# Altium PCB BugBusterMain.PcbDoc (part 4 of 6)
Units mm, origin at the board's own origin, x right, y up, seen from the top; angles counter-clockwise.
Board outline 110 x 80 mm, 6 copper layers (Top Layer, Inner Layer 1, Inner Layer 2, Inner Layer 3, Inner Layer 4, Bottom Layer), stack 1.546 mm thick; 244 components, 246 nets, 1173 pads, 1169 vias.
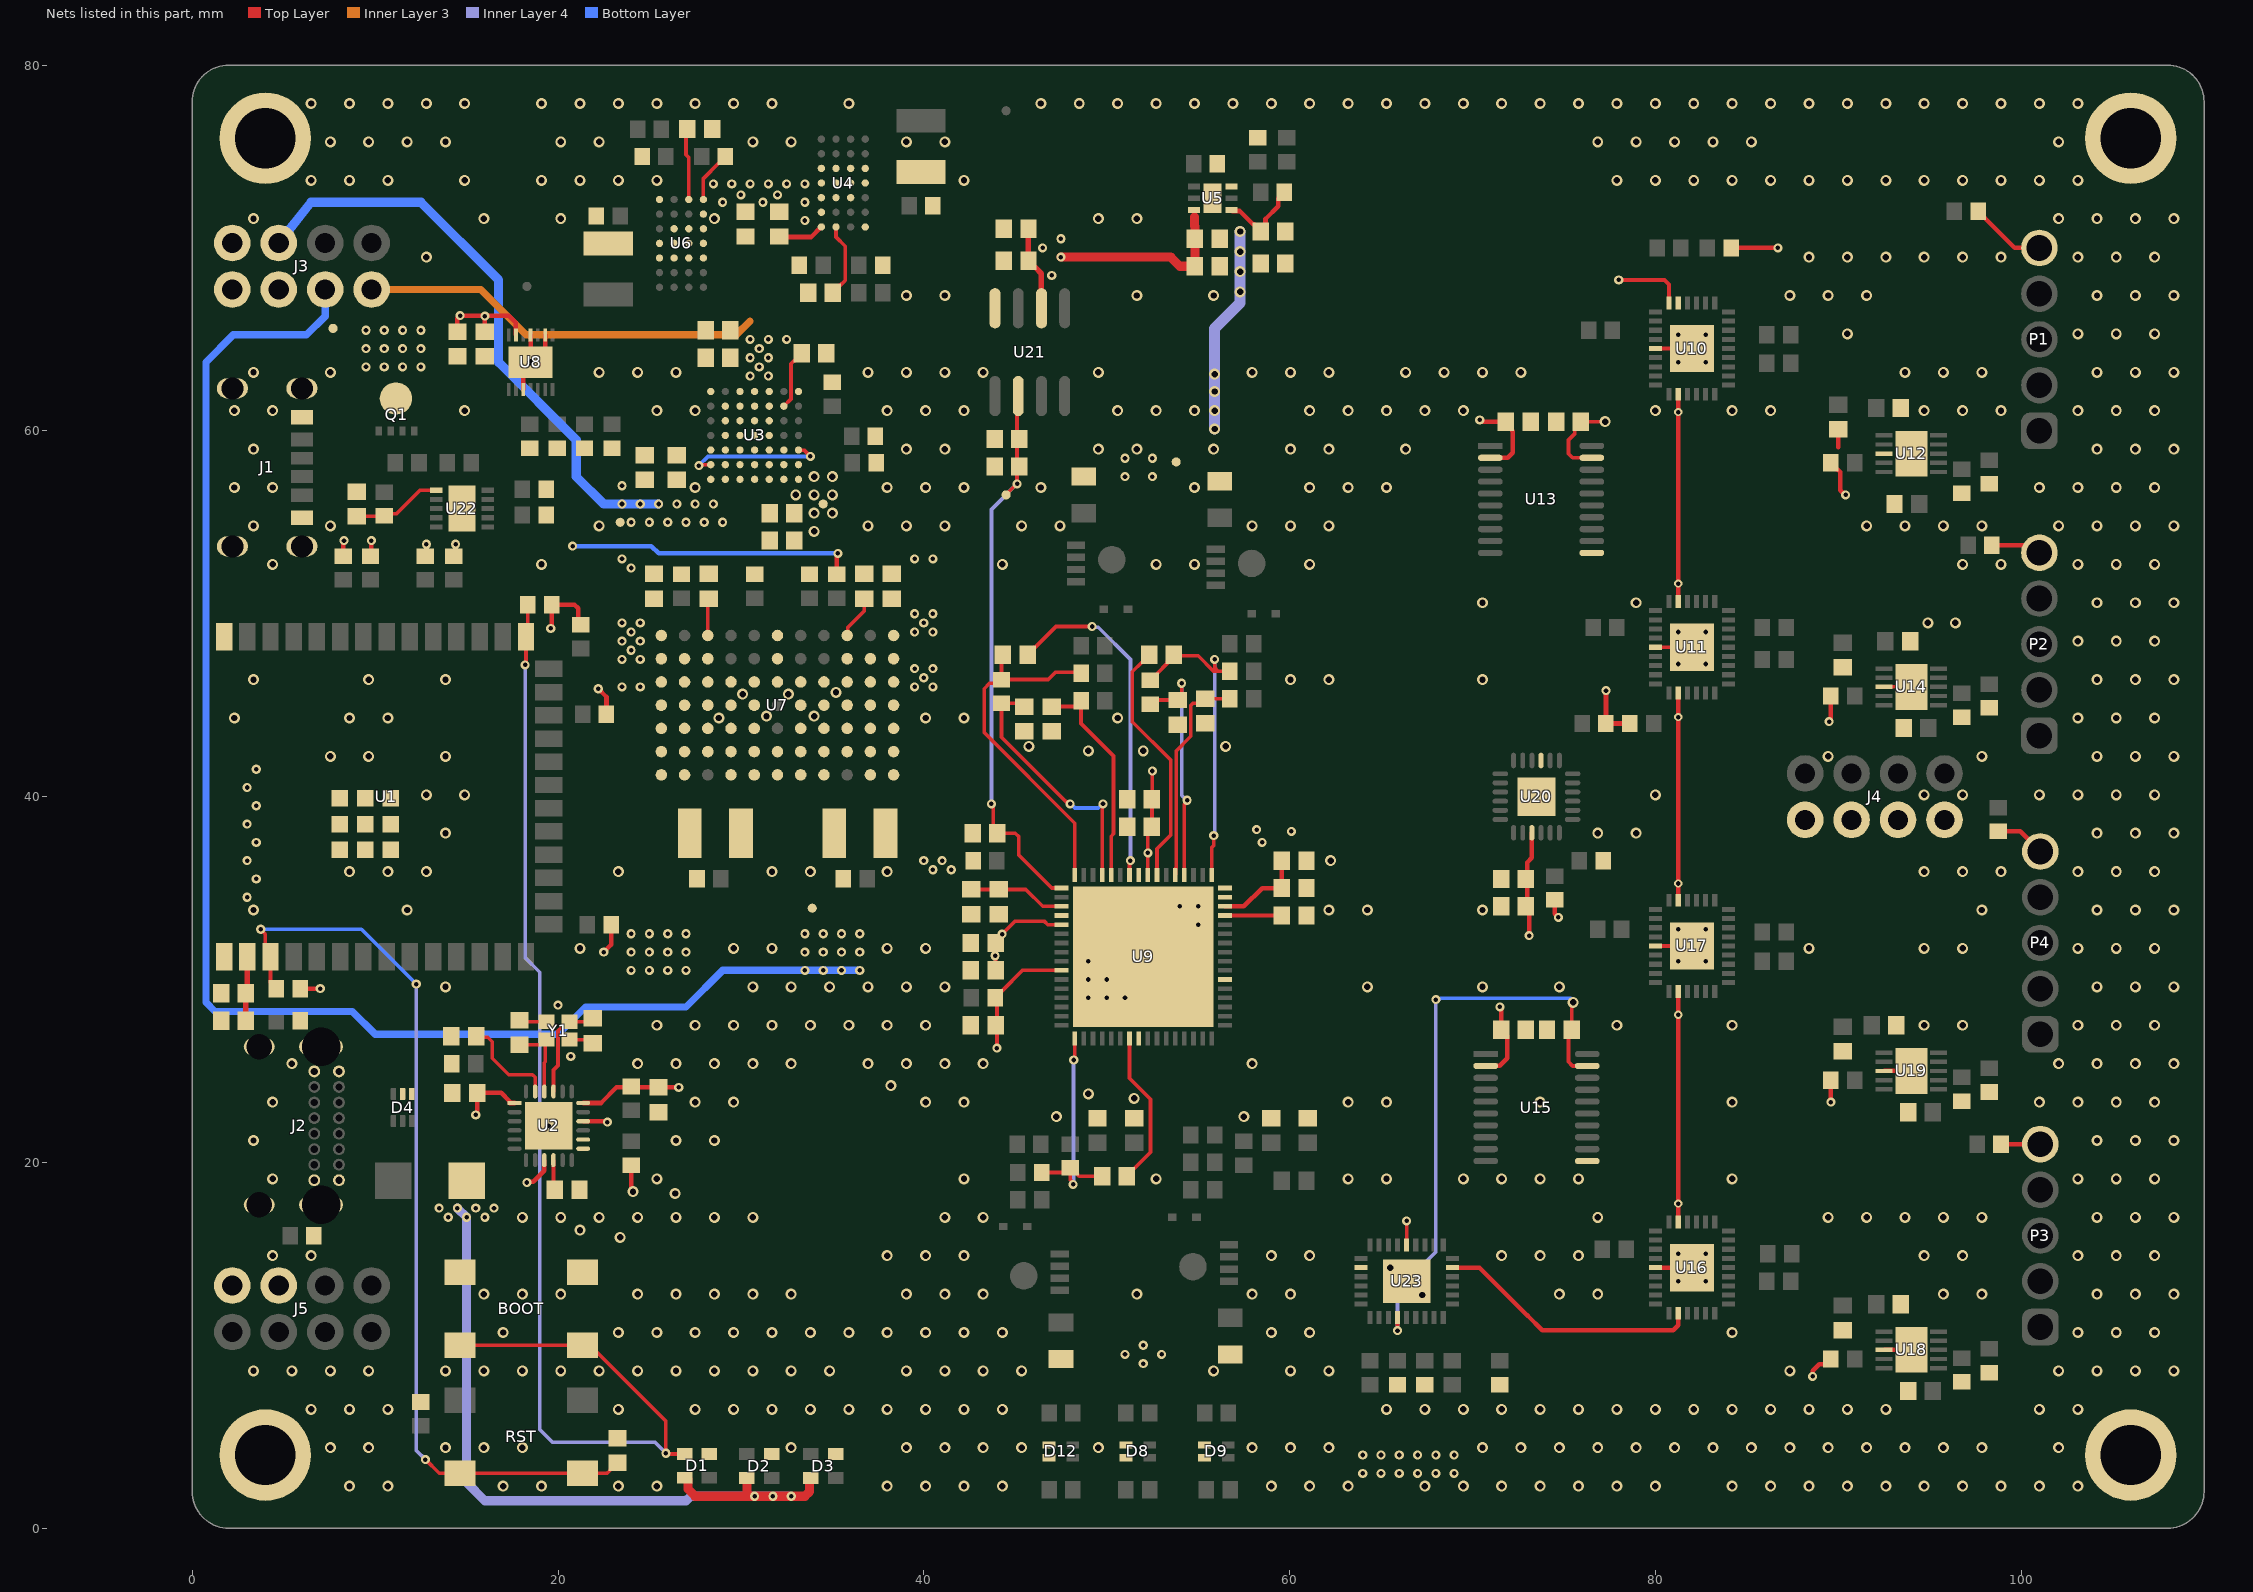
[diagram p6: the nets of this part, all layers, seen from the top]

## Via types
v1: diameter 0.6, hole 0.35, Top Layer to Bottom Layer, tented both sides, 608 vias
v2: diameter 0.5, hole 0.25, Top Layer to Bottom Layer, tented both sides, 555 vias
v3: diameter 0.45, hole 0.25, Top Layer to Bottom Layer, tented both sides, 6 vias

## Nets (pads, with @x,y where several pads share a name; then routed paths per layer and width w, separated by ;. In a path a pad name is that pad's centre, name@x,y a point inside that pad or via, vN(x,y) a via of type N, cw(c..) or ccw(c..) an arc to the next point about the centre after c; other vN are vias at no path point) (continued)
3V3_BUCK: (continued)
  Top Layer w0.25: R3.2@5.9,29.5 v2(7,29.5) ; R1.2@8.25,53.15 8.25,53.85 8.3,53.9 v2(8.3,54) ; R2.2@9.75,53.15 9.78,53.18 9.78,53.98 v2(9.8,54) ; R64.1@12.75,53.15 12.8,53.2 v2(12.8,53.8) ; R63.1@14.3,53.15 14.4,53.25 v2(14.4,53.8) ; C30.2@14.5,65.425 14.5,66.154 v2(14.646,66.3) v2@15.973,66.3 ; v2(15.5,22.6) 15.5,22.668 15.575,22.743 C6.2@15.575,23.8 16.9,23.8 17.369,23.331 17.369,23.255 17.374,23.25 U2.1@17.624,23.25 ; C31.2@16,65.425 v2(16,66.273) v2@15.973,66.3 ; U8.13@17.7,65.249 17.7,65.9 17.3,66.3 v2@15.973,66.3 ; v2(18.3,18.9) 18.342,18.942 18.642,18.942 19.25,19.55 U2.9@19.25,20.124 ; v2(19.6,49.2) 19.6,49.268 19.65,49.318 R5.1@19.65,50.5 20.9,50.5 21.1,50.3 21.1,49.55 R56.1@21.25,49.4 ; U2.16@21.376,22.25 22.582,22.25 22.632,22.2 v2(22.7,22.2) ; U2.18@21.376,23.25 22.35,23.25 23.2,24.1 C5.2@25.5,24.1 v2(26.6,24.1) ; v2(22.2,45.9) 22.65,45.45 R7.1@22.65,44.5 ; v2(22.5,31.5) 22.9,31.9 R6.1@22.9,33 ; R15.1@24,19.85 24,18.595 24.1,18.495 v1(24.1,18.4) ; R96.2@35.25,52.15 35.25,53.182 35.3,53.232 v2(35.3,53.3) ; U9.62@56.47,34 57.5,34 58.5,35 C39.1@59.575,35 C36.1@59.575,36.5 ; v2(70.4,60.6) 70.468,60.6 70.568,60.5 C66.2@71.825,60.5 72.15,60.175 72.15,60.029 72.2,59.979 72.2,58.8 71.925,58.525 U13.2@70.975,58.525 ; U15.2@70.725,25.275 70.739,25.289 71.489,25.289 71.9,25.7 71.9,26.925 C61.2@71.575,27.25 71.575,28.357 71.5,28.432 v2(71.5,28.5) ; v2(73.1,32.4) 73.1,33.825 C76.2@72.925,34 73,34.075 73,36.4 73.25,36.65 U20.21@73.25,38.025 ; R94.1@74.5,34.35 74.5,33.6 v2(74.7,33.4) ; v2(77.3,45.8) R112.2@77.3,44 R111.2@78.6,44 ; R78.1@84.15,70 v2(86.7,70) ; v2(88.6,8.3) 88.6,8.6 88.96,8.96 89.31,8.96 R88.1@89.6,9.25 ; v2(89.5,44.1) 89.5,44.168 89.6,44.268 R79.1@89.6,45.5 ; v2(89.6,23.3) R91.1@89.6,24.5 ; R70.1@89.6,58.25 89.6,58.2 89.9,57.9 89.95,57.9 90.1,57.75 90.1,56.746 90.346,56.5 v2(90.4,56.5)
  Top Layer w0.3: C3.2@2.925,27.75 C2.2@2.925,29.25 3.01,29.335 U1.2@3.01,31.25
  Bottom Layer w0.25: v2(20.8,53.7) 25.1,53.7 25.5,53.3 v2(35.3,53.3)
  other v1: 23.4,15.9 21.2,16.3 26.4,18.3 38.2,24.2 34,54.5 34,55.5 35,55.5 33,56.5 34,56.5 35,56.5 34,57.5 35,57.5
  other v2: 64,3 65,3 66,3 67,3 68,3 69,3 64,4 65,4 66,4 67,4 68,4 69,4 3,34.5 3.5,35.5 3,36.5 3.5,37.5 58.5,37.5 60.1,38.1 58.2,38.2 3,38.5 3.5,39.5 3,40.5 3.5,41.5
5V_BUCK: C11.2 C12.2 C21.2 C22.2 C28.2 C29.2 C37.1 C40.1 C77.2 C78.2 D1.4 D2.4 D3.4 D5.1 J3.3 pad.11 U3.E7 U3.F1 U3.F2 U3.G1 U3.G2 U5.6 U7.A5 U7.A6 U7.A7 U7.L5 U7.L6 U7.L7 U9.19 U21.2 | length 103.8
  Top Layer w0.2: v2(27.7,58.1) 27.75,58.15 U3.F1@28.35,58.15 ; U3.E7@33.15,58.95 33.154,58.946 33.454,58.946 v2(33.8,58.6) ; C40.1@42.6,34.925 C37.1@44.1,34.925 45.575,34.925 46.5,34 U9.19@47.53,34 ; U5.6@54.765,72.068 54.775,72.058 54.775,71.725 54.8,71.7
  Top Layer w0.3: C78.2@45.725,69.25 46.025,68.95 46.075,68.95 46.435,68.59 U21.2@46.435,66.7 ; C78.2@45.725,69.3 C77.2@45.725,71.05
  Top Layer w0.5: D1.4@26.929,2.758 27.029,2.758 27.104,2.683 27.104,2.146 27.5,1.75 v2@30.5,1.75 ; D2.4@30.325,2.75 30.325,1.925 v2@30.5,1.75 ; D3.4@33.825,2.75 33.757,2.682 33.757,2.007 33.5,1.75 v2(32.75,1.75) v2(31.75,1.75) v2(30.75,1.75) v2@30.5,1.75 ; v2(47.5,69.5) 53.5,69.5 54,69 C21.2@54.825,69 54.825,71.175 54.8,71.2 54.8,71.7
  Inner Layer 4 w0.5: v2(14.5,17.5) v2(15,17) 15,2.5 16,1.5 27,1.5 27.25,1.75 v2(30.75,1.75) v2(31.75,1.75) v2(32.75,1.75)
  Bottom Layer w0.2: v2(27.7,58.1) 28.2,58.6 v2(33.8,58.6)
  Bottom Layer w0.5: J3.3@4.73,70.27 6.5,72.5 12.5,72.5 16.75,68.25 16.75,63.75 21,59.5 21,57.5 22.5,56 v2(25.5,56)
  other v2: 14,17 16,17 13.5,17.5 15.5,17.5 16.5,17.5 40.5,36 41.5,36 40,36.5 41,36.5 23.5,46 24.5,46 39.5,46 40.5,46 40,46.5 39.5,47 40.5,47 23.5,47.5 24.5,47.5 24,48 23.5,48.5 24.5,48.5 24,49 39.5,49 40.5,49 23.5,49.5 24.5,49.5 40,49.5 39.5,50 40.5,50 24,52.5 23.5,53 39.5,53 40.5,53 24,55 25,55 26,55 27,55 28,55 29,55 23.5,56 24.5,56 26.5,56 27.5,56 28.5,56 23.5,57 47,68.5 46.5,70 47.5,70.5
20V_USB: C13.2 C14.2 C15.2 C25.2 J3.6 pad.8 Q1.5-6-7-8 U3.A3 U3.A4 U3.A5 U4.B4 U4.C4 U6.B4 U6.C4
  other v2: 30.5,63 31.5,63 9.5,63.5 10.5,63.5 11.5,63.5 12.5,63.5 31,63.5 30.5,64 31.5,64 9.5,64.5 10.5,64.5 11.5,64.5 12.5,64.5 31,64.5 30.5,65 31.5,65 32.5,65 9.5,65.5 10.5,65.5 11.5,65.5 12.5,65.5 33.5,71.5 29,72.5 31.2,72.5 33.5,72.5 30,72.9 32,72.9 28.5,73.5 29.5,73.5 30.5,73.5 31.5,73.5 32.5,73.5 33.5,73.5
+15V_ANA: C32.2 C38.1 C41.1 C42.2 J3.8 pad.5 R30.2 R39.2 R40.2 R41.2 R52.2 R53.2 U7.A1 U7.A2 U7.B1 U7.B2 U9.8 U9.26 U10.30 | length 38.7
  Top Layer w0.2: R41.2@43.9,29 cw(c43.9,28.9) 44,28.9 v2(44,26.25) ; R41.2@43.9,29.05 44.225,29.375 44.275,29.375 45.4,30.5 U9.26@47.53,30.5 ; U9.8@52.25,35.72 v2(52.25,36.923) 52.25,38.125 C41.1@52.475,38.35 C38.1@52.475,39.85 ccw(c52.475,39.875) 52.5,39.875 v2(52.5,41.4) ; v2(78,68.25) 80.5,68.25 80.75,68 U10.30@80.75,66.999
  Inner Layer 3 w0.4: J3.8@9.81,67.73 15.77,67.73 18.25,65.25 29.75,65.25 30.5,66
  other v2: 52,9 51,9.5 53,9.5 52,10 24,30.5 25,30.5 26,30.5 27,30.5 24,31.5 25,31.5 26,31.5 27,31.5 24,32.5 25,32.5 26,32.5 27,32.5 51,57.5 52.5,57.5 51,58.5 52.5,58.5
-15V_ANA: C34.1 C57.2 C58.2 J3.7 pad.7 R37.2 U7.G1 U7.G2 U7.H1 U7.H2 U7.J2 U9.21 U9.65 U10.5 U10.31 U11.5 U11.31 U16.5 U16.31 U17.5 U17.31 U23.5 U23.31 | length 97.5
  Top Layer w0.2: C58.2@43.925,30.5 C57.2@43.925,32 C57.2@43.925,32.131 ; v2(44.28,32.486) C57.2@43.925,32.131 ; U9.21@47.53,33 46.775,33 46.598,33.177 44.971,33.177 C57.2@43.925,32.131 ; U23.5@66.4,15.492 66.4,15.99 66.402,15.992 66.402,16.408 66.4,16.41 v2(66.4,16.8) ; U17.5@80.009,31.833 U17.31@82,31.833 ; U11.5@80.009,48.167 U11.31@82,48.167 ; U10.5@80.009,64.5 U10.31@82,64.5
  Top Layer w0.25: U16.5@80.009,14.25 U16.31@82,14.25
  Bottom Layer w0.4: J3.7@7.27,67.73 7.27,66.27 6.25,65.25 2.25,65.25 0.75,63.75 0.75,28.75 1.25,28.25 8.75,28.25 10,27 20,27 21.5,28.5 27,28.5 29,30.5 v2(36.5,30.5)
  other v1: 67.25,12.75 65.5,14.25
  other v2: 81.25,13.5 82.75,13.5 81.252,15 82.75,15 49,29 50,29 51,29 49,30 50,30 33.5,30.5 34.5,30.5 35.5,30.5 49,31 81.25,31 82.75,31 43.9,31.3 33.5,31.5 34.5,31.5 35.5,31.5 36.5,31.5 33.5,32.5 34.5,32.5 35.5,32.5 36.5,32.5 81.25,32.75 82.75,32.75 55,33 54,34 55,34 81.25,47.25 82.75,47.25 81.25,49 82.75,49 81.25,63.75 82.75,63.75 81.25,65.25 82.75,65.25
GND: BOOT.A1 BOOT.A2 C1.1 C2.1 C3.1 C4.1 C5.1 C6.1 C7.1 C8.1 C9.1 C10.1 C11.1 C12.1 C13.1 C14.1 C15.1 C16.1 C17.1 C18.1 C19.1 C20.1 C21.1 C22.1 C23.1 C24.1 C25.1 C26.1 C27.1 C28.1 C29.1 C30.1 C31.1 C32.1 C33.1 C34.2 C35.1 C36.2 C37.2 C38.2 C39.2 C40.2 C41.2 C42.1 C43.2 C44.1 C47.2 C48.2 C49.2 C50.2 C53.2 C54.2 C55.2 C56.2 C57.1 C58.1 C59.1 C60.1 C61.1 C62.1 C63.1 C64.1 C65.1 C66.1 C67.1 C68.1 C69.1 C70.1 C71.1 C72.1 C73.1 C74.1 C75.1 C76.1 C77.1 C78.1 C79.1 C80.1 D1.2 D2.2 D3.2 D4.4 D4.5 D8.3 D8.4 D9.3 D9.4 D12.3 D12.4 J1.1 J1.2 J1.3 J1.4 J1.A12 J1.B12 J2.1 J2.2 J2.3 J2.4 J2.A1 J2.A12 J2.B1 J2.B12 J3.4 J3.5 J4.5 J4.6 J4.7 J4.8 J5.3 J5.4 P1.5 P2.5 P3.5 P4.5 pad.1 pad.2 pad.3 pad.4 R4.1 R11.2 R12.2 R13.2 R14.2 R17.1 R18.1 R19.1 R20.1 R21.1 R23.1 R25.1 R26.1 R27.1 R29.1 R31.1 R32.1 R33.1 R34.1 R35.1 R36.1 R38.1 R50.2 R51.2 R65.2 R66.2 R67.2 R73.1 R76.1 R80.1 R81.1 R89.1 R90.1 R92.1 R93.1 R95.1 R103.1 R105.1 R106.2 R109.1 R110.1 U1.1 U1.40 U1.41_1 U1.41_2 U1.41_3 U1.41_4 U1.41_5 U1.41_6 U1.41_7 U1.41_8 U1.41_9 U2.13 U2.14 U2.25 U3.A1 U3.A7 U3.B2 U3.B3 U3.B4 U3.B5 U3.C2 U3.C3 U3.C4 U3.C5 U3.D2 U3.D3 U3.D4 U3.D5 U3.E1 U3.E2 U3.E3 U3.E4 U3.E5 U3.E6 U3.F3 U3.F4 U3.F5 U3.G3 U3.G4 U3.G5 U4.A1 U4.A4 U4.C2 U4.C3 U4.D1 U4.D2 U4.D3 U4.D4 U4.E1 U4.E2 U4.E3 U4.E4 U5.3 U5.7 U6.A1 U6.A4 U6.C2 U6.C3 U6.D1 U6.D2 U6.D3 U6.D4 U6.E1 U6.E2 U6.E3 U6.E4 U7.A3 U7.A4 U7.B3 U7.B4 U7.B5 U7.B6 U7.C2 U7.C3 U7.C4 U7.C5 U7.C6 U7.D1 U7.D2 U7.D3 U7.D4 U7.D5 U7.E1 U7.E2 U7.E3 U7.E4 U7.E5 U7.F1 U7.F2 U7.F5 U7.F6 U7.F7 U7.G3 U7.G4 U7.G5 U7.H3 U7.H4 U7.H5 U7.J3 U7.J4 U7.J5 U7.J6 U7.K1 U7.K2 U7.K3 U7.K4 U7.K5 U7.K6 U7.L1 U7.L2 U7.L3 U7.L4 U8.3 U8.9 U8.11 U8.15 U9.9 U9.20 U9.40 U9.54 U9.63 U9.64 U10.11 U10.29 U11.11 U11.29 U12.3 U12.11 U13.11 U14.3 U14.11 U15.11 U16.11 U16.29 U17.11 U17.29 U18.3 U18.11 U19.3 U19.11 U20.9 U20.25 U21.4 U22.11 U23.11 U23.29 Y1.2 Y1.4 | length 80.3
  Top Layer w0.2: C9.1@17.9,27.775 17.987,27.688 Y1.4@19.362,27.688 ; Y1.2@20.637,26.713 21.712,26.713 C10.1@21.9,26.525 ; U6.A4@27.95,72.65 27.95,73.8 28.775,74.625 28.825,74.625 29.15,74.95 R26.1@29.15,75 ; U14.3@92.509,46 U14.11@94,46
  Top Layer w0.25: U8.3@18.1,62.251 18.1,63.35 v1(18.5,63.75) U8.11@18.5,65.249 ; U8.15@18.574,63.75 19.3,64.476 U8.9@19.3,65.249 ; C13.1@32.1,70.625 32.125,70.6 33.85,70.6 U4.A4@34.4,71.15 ; U23.29@68.899,14.25 70.384,14.25 73.003,11.631 73.012,11.631 73.825,10.817 80.97,10.817 81.25,11.097 U16.11@81.25,11.75 ; v3@81.248,35.284 v3@81.25,35.284 ; U16.29@81.25,16.749 U17.11@81.25,29.334 ; U17.29@81.25,34.333 v3@81.25,35.284 ; U11.11@81.25,45.667 v3@81.25,35.284 ; U11.29@81.25,50.666 U10.11@81.25,62 ; 90,59.1 C60.1@90,60.075 ; U18.3@92.509,9.75 U18.11@94,9.75 ; U19.3@92.509,25 U19.11@94,25 ; R50.2@97.65,72 97.65,71.95 97.95,71.65 98,71.65 99.65,70 P1.5@101,70 ; R51.2@98.4,53.75 100.11,53.75 100.526,53.333 P2.5@101,53.333 ; R65.2@98.75,38.1 99.95,38.1 P4.5@101.05,37 ; R66.2@98.9,21 P3.5@101.05,21
  other v1: 8.6,2.3 10.7,2.3 17,2.3 19.1,2.3 23.3,2.3 25.4,2.3 38,2.3 40.1,2.3 42.2,2.3 44.3,2.3 59,2.3 61.1,2.3 63.2,2.3 67.4,2.3 69.5,2.3 71.6,2.3 73.7,2.3 75.8,2.3 77.9,2.3 80,2.3 84.2,2.3 86.3,2.3 88.4,2.3 90.5,2.3 92.6,2.3 94.7,2.3 96.8,2.3 98.9,2.3 101,2.3 103.1,2.3 7.55,4.4 9.65,4.4 13.85,4.4 15.95,4.4 18.05,4.4 32.75,4.4 39.05,4.4 41.15,4.4 43.25,4.4 45.35,4.4 49.55,4.4 57.95,4.4 60.05,4.4 62.15,4.4 70.55,4.4 72.65,4.4 74.75,4.4 76.85,4.4 78.95,4.4 81.05,4.4 83.15,4.4 85.25,4.4 87.35,4.4 89.45,4.4 91.55,4.4 93.65,4.4 95.75,4.4 97.85,4.4 102.05,4.4 6.5,6.5 8.6,6.5 10.7,6.5 23.3,6.5 27.5,6.5 29.6,6.5 31.7,6.5 33.8,6.5 35.9,6.5 38,6.5 40.1,6.5 42.2,6.5 44.3,6.5 65.3,6.5 67.4,6.5 69.5,6.5 71.6,6.5 73.7,6.5 75.8,6.5 77.9,6.5 80,6.5 82.1,6.5 84.2,6.5 86.3,6.5 88.4,6.5 90.5,6.5 92.6,6.5 101,6.5 103.1,6.5 3.35,8.6 5.45,8.6 7.55,8.6 9.65,8.6 13.85,8.6 15.95,8.6 18.05,8.6 20.15,8.6 22.25,8.6 24.35,8.6 26.45,8.6 28.55,8.6 30.65,8.6 32.75,8.6 34.85,8.6 39.05,8.6 41.15,8.6 43.25,8.6 45.35,8.6 55.85,8.6 60.05,8.6 62.15,8.6 87.35,8.6 102.05,8.6 104.15,8.6 106.25,8.6 108.35,8.6 17,10.7 23.3,10.7 25.4,10.7 27.5,10.7 29.6,10.7 31.7,10.7 33.8,10.7 35.9,10.7 38,10.7 40.1,10.7 42.2,10.7 44.3,10.7 59,10.7 61.1,10.7 84.2,10.7 103.1,10.7 105.2,10.7 107.3,10.7 15.95,12.8 18.05,12.8 20.15,12.8 24.35,12.8 26.45,12.8 28.55,12.8 30.65,12.8 32.75,12.8 39.05,12.8 41.15,12.8 43.25,12.8 51.65,12.8 57.95,12.8 60.05,12.8 74.75,12.8 76.85,12.8 95.75,12.8 97.85,12.8 104.15,12.8 106.25,12.8 108.35,12.8 4.4,14.9 6.5,14.9 38,14.9 40.1,14.9 42.2,14.9 59,14.9 61.1,14.9 71.6,14.9 73.7,14.9 75.8,14.9 94.7,14.9 96.8,14.9 103.1,14.9 105.2,14.9 107.3,14.9 18.05,17 20.15,17 22.25,17 24.35,17 26.45,17 28.55,17 30.65,17 41.15,17 43.25,17 76.85,17 89.45,17 91.55,17 93.65,17 95.75,17 97.85,17 104.15,17 106.25,17 108.35,17 4.4,19.1 25.4,19.1 42.2,19.1 52.7,19.1 63.2,19.1 65.3,19.1 69.5,19.1 71.6,19.1 73.7,19.1 75.8,19.1 84.2,19.1 103.1,19.1 105.2,19.1 107.3,19.1 3.35,21.2 26.45,21.2 28.55,21.2 104.15,21.2 106.25,21.2 108.35,21.2 47.25,22.5 57.5,22.5 4.4,23.3 27.5,23.3 29.6,23.3 40.1,23.3 42.2,23.3 63.2,23.3 65.3,23.3 73.7,23.3 84.2,23.3 101,23.3 103.1,23.3 105.2,23.3 107.3,23.3 51.5,23.5 49,23.75 5.45,25.4 24.35,25.4 26.45,25.4 28.55,25.4 30.65,25.4 32.75,25.4 36.95,25.4 39.05,25.4 41.15,25.4 43.25,25.4 57.95,25.4 102.05,25.4 104.15,25.4 106.25,25.4 108.35,25.4 25.4,27.5 27.5,27.5 29.6,27.5 31.7,27.5 33.8,27.5 35.9,27.5 38,27.5 40.1,27.5 77.9,27.5 84.2,27.5 94.7,27.5 96.8,27.5 103.1,27.5 105.2,27.5 107.3,27.5 13.85,29.6 30.65,29.6 32.75,29.6 34.85,29.6 36.95,29.6 39.05,29.6 41.15,29.6 64.25,29.6 70.55,29.6 74.75,29.6 104.15,29.6 106.25,29.6 108.35,29.6 21.2,31.7 29.6,31.7 31.7,31.7 38,31.7 40.1,31.7 88.4,31.7 94.7,31.7 96.8,31.7 103.1,31.7 105.2,31.7 107.3,31.7 3.35,33.8 11.75,33.8 62.15,33.8 64.25,33.8 70.55,33.8 97.85,33.8 104.15,33.8 106.25,33.8 108.35,33.8 8.6,35.9 10.7,35.9 12.8,35.9 23.3,35.9 31.7,35.9 33.8,35.9 38,35.9 94.7,35.9 96.8,35.9 98.9,35.9 103.1,35.9 105.2,35.9 107.3,35.9 62.25,36.5 13.85,38 76.85,38 78.95,38 104.15,38 106.25,38 108.35,38 12.8,40.1 14.9,40.1 80,40.1 94.7,40.1 96.8,40.1 101,40.1 103.1,40.1 105.2,40.1 107.3,40.1 7.55,42.2 9.65,42.2 13.85,42.2 89.45,42.2 97.85,42.2 104.15,42.2 106.25,42.2 108.35,42.2 49,42.5 52,42.5 45.75,42.75 56.5,42.75 2.3,44.3 8.6,44.3 10.7,44.3 28.8,44.3 40.1,44.3 42.2,44.3 50.6,44.3 103.1,44.3 105.2,44.3 107.3,44.3 31.4,44.4 34,44.4 30.1,45.6 32.6,45.6 35.2,45.7 3.35,46.4 9.65,46.4 13.85,46.4 60.05,46.4 62.15,46.4 70.55,46.4 104.15,46.4 106.25,46.4 108.35,46.4 103.1,48.5 105.2,48.5 107.3,48.5 94.9,49.5 96.4,49.5 70.55,50.6 78.95,50.6 104.15,50.6 106.25,50.6 108.35,50.6 4.4,52.7 19.1,52.7 44.3,52.7 52.7,52.7 54.8,52.7 61.1,52.7 96.8,52.7 98.9,52.7 103.1,52.7 105.2,52.7 107.3,52.7 3.35,54.8 7.55,54.8 22.25,54.8 36.95,54.8 39.05,54.8 41.15,54.8 45.35,54.8 47.45,54.8 57.95,54.8 60.05,54.8 62.15,54.8 91.55,54.8 93.65,54.8 95.75,54.8 97.85,54.8 102.05,54.8 104.15,54.8 106.25,54.8 108.35,54.8 2.3,56.9 4.4,56.9 27.5,56.9 38,56.9 40.1,56.9 42.2,56.9 46.4,56.9 54.8,56.9 61.1,56.9 63.2,56.9 65.3,56.9 101,56.9 103.1,56.9 105.2,56.9 107.3,56.9 3.35,59 39.05,59 41.15,59 49.55,59 51.65,59 55.85,59 60.05,59 62.15,59 66.35,59 104.15,59 106.25,59 108.35,59 2.3,61.1 4.4,61.1 14.9,61.1 25.4,61.1 27.5,61.1 38,61.1 40.1,61.1 42.2,61.1 50.6,61.1 52.7,61.1 54.8,61.1 61.1,61.1 63.2,61.1 65.3,61.1 67.4,61.1 69.5,61.1 80,61.1 84.2,61.1 86.3,61.1 94.7,61.1 96.8,61.1 98.9,61.1 103.1,61.1 105.2,61.1 107.3,61.1 3.35,63.2 7.55,63.2 22.25,63.2 24.35,63.2 26.45,63.2 36.95,63.2 39.05,63.2 41.15,63.2 43.25,63.2 49.55,63.2 57.95,63.2 60.05,63.2 62.15,63.2 66.35,63.2 68.45,63.2 70.55,63.2 72.65,63.2 93.65,63.2 95.75,63.2 97.85,63.2 104.15,63.2 106.25,63.2 108.35,63.2 90.5,65.3 103.1,65.3 105.2,65.3 107.3,65.3 39.05,67.4 41.15,67.4 51.65,67.4 55.85,67.4 87.35,67.4 89.45,67.4 91.55,67.4 104.15,67.4 106.25,67.4 108.35,67.4 12.8,69.5 88.4,69.5 90.5,69.5 92.6,69.5 94.7,69.5 96.8,69.5 98.9,69.5 103.1,69.5 105.2,69.5 107.3,69.5 3.35,71.6 15.95,71.6 20.15,71.6 28.55,71.6 49.55,71.6 51.65,71.6 102.05,71.6 104.15,71.6 106.25,71.6 108.35,71.6 6.5,73.7 8.6,73.7 10.7,73.7 14.9,73.7 19.1,73.7 21.2,73.7 23.3,73.7 25.4,73.7 42.2,73.7 77.9,73.7 80,73.7 82.1,73.7 84.2,73.7 86.3,73.7 88.4,73.7 90.5,73.7 92.6,73.7 94.7,73.7 96.8,73.7 98.9,73.7 101,73.7 103.1,73.7 7.55,75.8 9.65,75.8 11.75,75.8 13.85,75.8 20.15,75.8 22.25,75.8 30.65,75.8 32.75,75.8 39.05,75.8 41.15,75.8 76.85,75.8 78.95,75.8 81.05,75.8 83.15,75.8 85.25,75.8 102.05,75.8 6.5,77.9 8.6,77.9 10.7,77.9 12.8,77.9 14.9,77.9 19.1,77.9 21.2,77.9 23.3,77.9 25.4,77.9 27.5,77.9 29.6,77.9 31.7,77.9 35.9,77.9 46.4,77.9 48.5,77.9 50.6,77.9 52.7,77.9 54.8,77.9 56.9,77.9 59,77.9 61.1,77.9 63.2,77.9 65.3,77.9 67.4,77.9 69.5,77.9 71.6,77.9 73.7,77.9 75.8,77.9 77.9,77.9 80,77.9 82.1,77.9 84.2,77.9 86.3,77.9 88.4,77.9 90.5,77.9 92.6,77.9 94.7,77.9 96.8,77.9 98.9,77.9 101,77.9 103.1,77.9
  other v2: 19.5,22 20.7,25.8 20,28.6
  other v3: 81.25,17.75 81.25,28.075 81.25,35.25 81.25,44.35 81.25,51.65 81.25,61.025
NetBOOT_B1: BOOT.B1 BOOT.B2 D1.3 R5.2 U1.27 | length 68.7
  Top Layer w0.2: BOOT.B1@14.65,10 21.75,10 25.9,5.85 v2(25.9,4.1) 25.942,4.058 D1.3@26.929,4.058 ; v2(18.2,47.2) 18.25,47.25 U1.27@18.25,48.75 18.35,48.85 R5.2@18.35,50.5
  Inner Layer 4 w0.2: v2(18.2,47.2) 18.2,31.2 19,30.4 19,5.4 19.7,4.7 25.3,4.7 v2(25.9,4.1)
NetC1_2: C1.2 R3.1 RST.B1 RST.B2 U1.3 | length 50.6
  Top Layer w0.2: v2(3.75,32.75) 3.75,32.733 4,32.483 4,31.53 U1.3@4.28,31.25 4.28,29.82 R3.1@4.6,29.5 ; v2(12.75,3.75) 13.5,3 RST.B1@14.65,3 RST.B2@21.35,3 22.675,3 22.85,3.175 22.85,3.225 23.2,3.575 C1.2@23.25,3.575
  Inner Layer 4 w0.2: v2(12.25,29.75) 12.25,4.25 v2(12.75,3.75)
  Bottom Layer w0.2: v2(3.75,32.75) 9.25,32.75 v2(12.25,29.75)
NetC4_2: C4.2 R8.1 U22.1 | length 4.9
  Top Layer w0.2: C4.2@9,55.325 10.475,55.325 R8.1@10.5,55.35 10.608,55.458 11.158,55.458 12.45,56.75 U22.1@13.343,56.75
NetC7_2: C7.2 U2.23 | length 5.5
  Top Layer w0.2: C7.2@15.525,26.9 15.583,26.842 16.158,26.842 16.4,26.6 16.4,25.7 17.3,24.8 18.6,24.8 18.75,24.65 U2.23@18.75,23.876
NetC8_2: C8.2 U2.10 | length 1.7
  Top Layer w0.2: U2.10@19.75,20.124 19.75,18.575 C8.2@19.825,18.5
NetC9_2: C9.2 U2.22 Y1.1 | length 4.5
  Top Layer w0.2: C9.2@17.9,26.425 19.025,26.425 19.312,26.713 Y1.1@19.362,26.713 19.3,26.65 19.3,25.5 19.25,25.45 U2.22@19.25,23.876
NetC10_2: C10.2 U2.21 Y1.3 | length 5.6
  Top Layer w0.2: U2.21@19.75,23.876 19.75,25.05 20,25.3 20,27.2 20.2,27.4 20.35,27.4 Y1.3@20.637,27.688 21.712,27.688 C10.2@21.9,27.875
NetC19_2: C19.2 U4.A3 | length 4.1
  Top Layer w0.2: C19.2@35.025,67.55 35.025,67.6 35.375,67.95 35.425,67.95 35.7,68.225 35.7,70.1 35.2,70.6 U4.A3@35.2,71.15
NetC20_2: C20.2 U3.B6 | length 3.3
  Top Layer w0.2: U3.B6@32.35,61.35 32.739,61.739 32.739,63.664 32.925,63.85 32.975,63.85 33.325,64.2 C20.2@33.325,64.25
NetC27_2: C27.2 U6.A3 | length 3.9
  Top Layer w0.2: C27.2@27.075,76.5 27,76.425 27,75.1 27.15,74.95 U6.A3@27.15,72.65
NetC33_2: C33.2 U7.C7 | length 2
  Top Layer w0.2: U7.C7@28.19,48.81 28.19,50.765 C33.2@28.25,50.825
NetC35_2: C35.2 U7.J7 | length 2.4
  Top Layer w0.2: U7.J7@35.81,48.81 35.845,48.845 35.845,49.245 36.75,50.15 C35.2@36.75,50.825
NetC43_1: C43.1 U9.61 | length 3.1
  Top Layer w0.2: U9.61@56.47,33.5 C43.1@59.575,33.5
NetC45_1: C45.1 U9.7 | length 13.6
  Top Layer w0.2: C45.1@52.325,47.75 52.325,47.7 51.975,47.35 51.925,47.35 51.4,46.825 51.4,44.1 53.5,42 53.5,37.9 52.75,37.15 U9.7@52.75,35.72
NetC45_2: C45.2 R44.1 R46.2 U9.1 | length 18
  Top Layer w0.2: R46.2@52.383,46.358 52.433,46.358 52.758,46.683 52.758,46.733 53.325,47.3 53.325,47.4 C45.2@53.675,47.75 53.725,47.7 55,47.7 55.842,46.858 56.1,46.858 ; U9.1@55.75,35.72 55.75,37.222 55.85,37.322 55.85,37.869 v2(55.853,37.872) ; v2(55.9,47.5) 55.9,47.058 56.1,46.858 ; R44.1@56.733,46.858 56.1,46.858
  Inner Layer 4 w0.2: v2(55.853,37.872) 55.9,37.919 v2(55.9,47.5)
NetC46_1: C46.1 U9.10 | length 18.8
  Top Layer w0.2: C46.1@45.675,47.75 45.675,47.8 46.025,48.15 46.075,48.15 47.225,49.3 v2(49.2,49.3) ; U9.10@51.25,35.72 51.25,36.45 v2(51.3,36.5)
  Inner Layer 4 w0.2: v2(49.2,49.3) 49.239,49.261 49.539,49.261 51.3,47.5 v2(51.3,36.5)
NetC46_2: C46.2 R45.1 R48.2 U9.16 | length 19.3
  Top Layer w0.2: C46.2@44.325,47.75 44.25,47.675 R48.2@44.25,46.4 ; U9.16@48.25,35.72 48.25,38.55 43.3,43.5 43.3,45.9 43.592,46.192 44.042,46.192 R48.2@44.25,46.4 ; R45.1@48.6,46.75 48.55,46.8 47.2,46.8 46.8,46.4 R48.2@44.25,46.4
NetC47_1: C47.1 R46.1 U9.4 | length 13.3
  Top Layer w0.2: R46.1@52.383,45.058 52.608,45.283 C47.1@53.883,45.283 54.1,45.5 v2(54.1,46.2) ; U9.4@54.25,35.72 54.25,39.569 54.4,39.719 v2(54.4,39.8)
  Inner Layer 4 w0.2: v2(54.1,46.2) 54.1,40.067 54.367,39.8 v2(54.4,39.8)
NetC48_1: C48.1 R47.1 U9.5 | length 11.9
  Top Layer w0.2: U9.5@53.75,35.72 53.777,35.747 53.777,36.096 53.8,36.119 53.8,42.5 54.6,43.3 54.6,44.983 54.717,45.1 55.125,45.1 C48.1@55.383,45.358 R47.1@56.733,45.358
NetC49_1: C49.1 R48.1 U9.13 | length 14.3
  Top Layer w0.2: C49.1@45.5,44.925 45.325,45.1 R48.1@44.25,45.1 44.25,43.25 47.761,39.739 47.78,39.739 47.919,39.6 v2(48,39.6) ; U9.13@49.75,35.72 49.75,39.55 v2(49.8,39.6)
  Bottom Layer w0.2: v2(48,39.6) 48.042,39.6 48.267,39.375 49.533,39.375 49.758,39.6 v2(49.8,39.6)
NetC50_1: C50.1 R49.1 U9.12 | length 12.1
  Top Layer w0.2: C50.1@47,44.925 48.275,44.925 R49.1@48.6,45.25 48.6,44 50.377,42.223 50.377,37.963 50.25,37.836 U9.12@50.25,35.72
NetC51_1: C51.1 U9.39 | length 8.6
  Top Layer w0.2: C51.1@51.1,19.25 51.1,19.3 51.45,19.65 51.5,19.65 52.4,20.55 52.4,23.45 51.25,24.6 U9.39@51.25,26.78
NetC51_2: C51.2 R57.1 R59.2 U9.33 | length 12.5
  Top Layer w0.2: R57.1@46.45,19.45 47.7,19.45 R59.2@47.95,19.7 ; R59.2@48,19.7 48,19.047 48.166,18.881 v2(48.166,18.8) ; R59.2@48.05,19.7 48.375,19.375 48.375,19.367 48.492,19.25 C51.2@49.75,19.25 ; v2(48.2,25.6) 48.25,25.65 U9.33@48.25,26.78
  Inner Layer 4 w0.2: v2(48.166,18.8) 48.183,18.817 48.183,25.583 v2(48.2,25.6)